# EAGLE board Board (EAGLE 9.7.0)
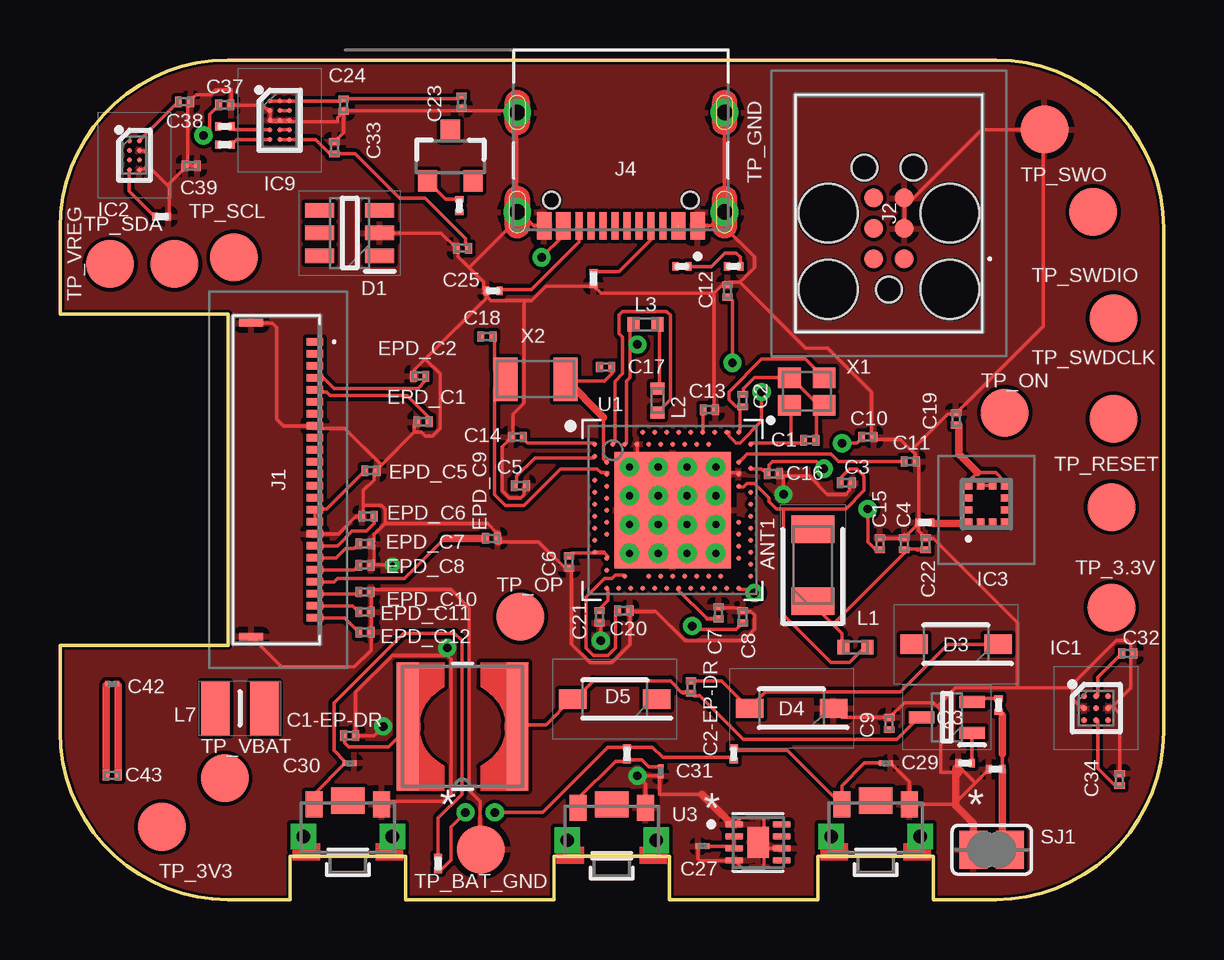
[diagram p0: board, top side]
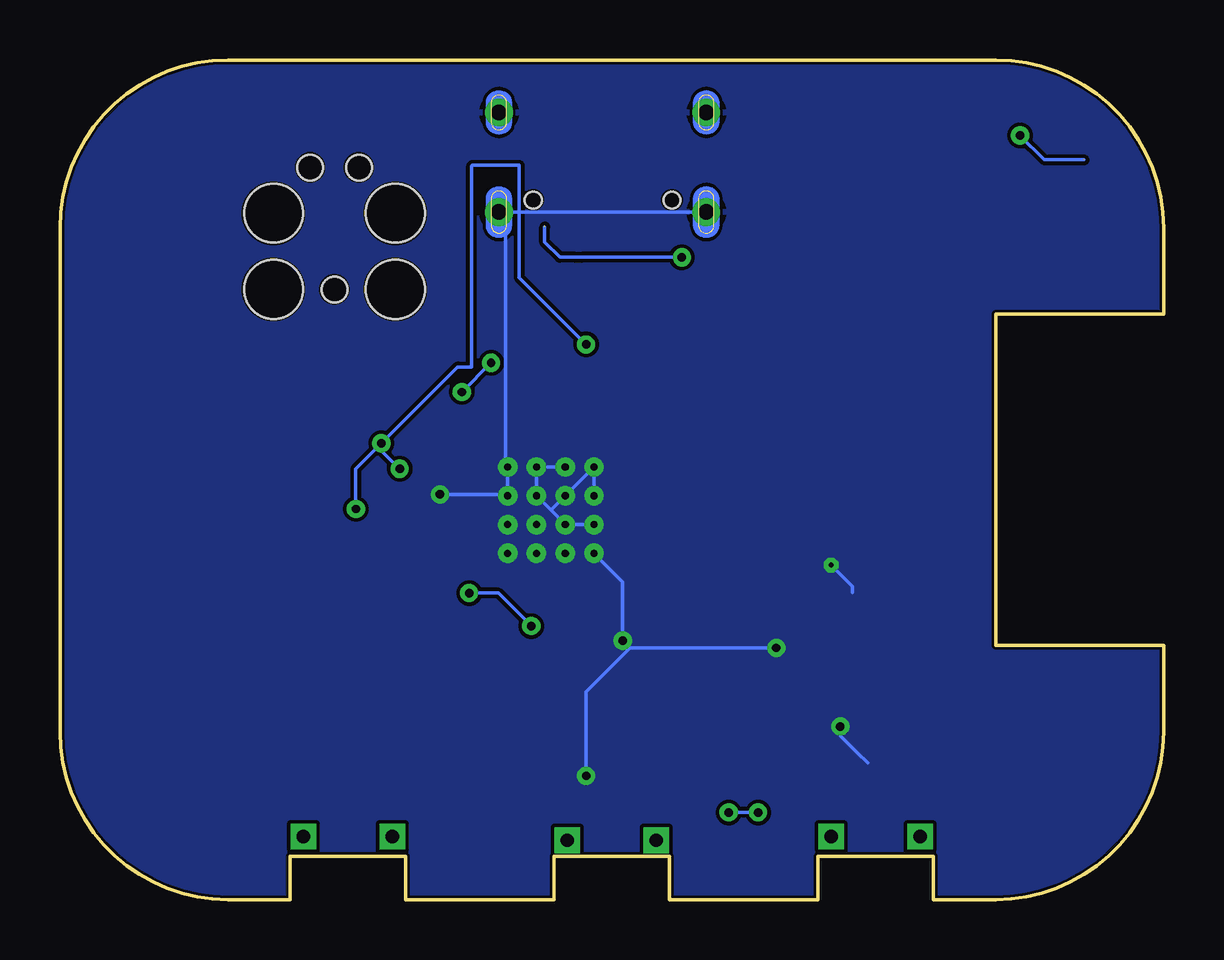
[diagram p1: board, bottom side, seen from below]

Size 46 x 35 mm. Coordinates in mm from the lower left corner, seen from the top.
Outline: 39,0 36.4,0 36.4,1.8 31.6,1.8 31.6,0 25.4,0 25.4,1.8 20.6,1.8 20.6,0 14.4,0 14.4,1.8 9.6,1.8 9.6,0 7,0 arc-90 0,7 0,10.6 7,10.6 7,24.4 0,24.4 0,28 arc-90 7,35 39,35 arc-90 46,28 46,7 arc-90 39,0
Copper layers (1*16): Top 0.035mm / dielectric 1.5mm / Bottom 0.035mm
Design rules "Fusion Electronics Design Rules": minimum track width 6mil, minimum drill 0.2mm, track to track 6mil, track to pad 6mil, pad to pad 6mil, via to via 6mil, smd to smd 0.1324mm, copper to edge 0.1mm, drill to drill 6mil, minimum pad ring 10mil, minimum via ring 8mil, stop-mask expansion 4mil, vias tented up to drill 9999mil, thermal gap 10mil

## Footprints (pad centres in the part's own frame; a part is rotated, then mirrored left to right if it is on the bottom)
2450AT18B100E_ANTC3216X140N = smd 1.15 x 1.8: 1 -1.5,0; 2 1.5,0
NORDIC_NRF_3_RESC0201_L = smd 0.28 x 0.43: 1 -0.255,0; 2 0.255,0
GRM011R60J152KE01L_2_CAPC0201X13N = smd 0.22 x 0.23: 1 -0.185,0; 2 0.185,0
ESP32_C6_LIBRARY_3_SOT95P280X145-6N = smd 1.2 x 0.6: 1 -1.25,0.95; 2 -1.25,0; 3 -1.25,-0.95; 4 1.25,-0.95; 5 1.25,0; 6 1.25,0.95
ESP32_C6_LIBRARY_5_SOD3716X135N = smd 1.15 x 0.8: 1 -1.75,0; 2 1.75,0
ESP32_C6_LIBRARY_4_ESP32_C6_LIBRARY_4_ESP32_C6_LIBRARY_4_ESP32_C6_LIBRARY_4_ESP32_WROVER_SPARKFUN-DISCRETESEMI_SOT23-3 = smd 0.8 x 0.9: 1 -0.95,-1; 2 0.95,-1; 3 0,1.1
DRV2605YZFR_BGA9C50P3X3_144X144X62 = smd 0.25 x 0.25: A1 -0.5,0.5; A2 0,0.5; A3 0.5,0.5; B1 -0.5,0; B2 0,0; B3 0.5,0; C1 -0.5,-0.5; C2 0,-0.5; C3 0.5,-0.5
BQ25180YBGR_BGA8C40P2X4_100X155X50 = smd 0.2 x 0.2: A1 -0.2,0.6; A2 0.2,0.6; B1 -0.2,0.2; B2 0.2,0.2; C1 -0.2,-0.2; C2 0.2,-0.2; D1 -0.2,-0.6; D2 0.2,-0.6
BMA423_BMA423 = smd 0.3 x 0.35: 1 -0.75,-0.775; 2 -0.25,-0.775; 3 0.25,-0.775; 4 0.75,-0.775; 7 0.75,0.775; 8 0.25,0.775; 9 -0.25,0.775; 10 -0.75,0.775 | smd 0.35 x 0.3: 5 0.775,-0.25; 6 0.775,0.25; 11 -0.775,0.25; 12 -0.775,-0.25
RT6160AWSC_BGA15C40P3X5_140X230X60 = smd 0.216 x 0.216: A1 -0.4,0.8; A2 0,0.8; A3 0.4,0.8; B1 -0.4,0.4; B2 0,0.4; B3 0.4,0.4; C1 -0.4,0; C2 0,0; C3 0.4,0; D1 -0.4,-0.4; D2 0,-0.4; D3 0.4,-0.4; E1 -0.4,-0.8; E2 0,-0.8; E3 0.4,-0.8
503480-2400_5034802400 = smd 0.3 x 0.7: 1 -5.75,1.525; 2 -5.25,1.525; 3 -4.75,1.525; 4 -4.25,1.525; 5 -3.75,1.525; 6 -3.25,1.525; 7 -2.75,1.525; 8 -2.25,1.525; 9 -1.75,1.525; 10 -1.25,1.525; 11 -0.75,1.525; 12 -0.25,1.525; 13 0.25,1.525; 14 0.75,1.525; 15 1.25,1.525; 16 1.75,1.525; 17 2.25,1.525; 18 2.75,1.525; 19 3.25,1.525; 20 3.75,1.525; 21 4.25,1.525; 22 4.75,1.525; 23 5.25,1.525; 24 5.75,1.525 | smd 0.3 x 1: MP1 -6.54,-1.125; MP2 6.54,-1.125
TC2030-IDC_TC2030IDC = smd 0.783 x 0.783: 1 -0.953,-0.635; 2 -0.953,0.635; 3 0.317,-0.635; 4 0.317,0.635; 5 1.588,-0.635; 6 1.588,0.635 | hole 2.451: -2.223,-2.54; -2.223,2.54; 0.952,-2.54; 0.952,2.54 | hole 1.067: -2.223,0; 2.857,-1.016; 2.857,1.016
KH-TYPE-C-16P_KINGHELM_KH-TYPE-C-16P = smd 0.6 x 1.15: A1_B12 -3.2,4.725; A4_B9 -2.4,4.725; A9_B4 2.4,4.725; A12_B1 3.2,4.725 | smd 0.3 x 1.15: A5 -1.25,4.725; A6 -0.25,4.725; A7 0.25,4.725; A8 1.25,4.725; B5 1.75,4.725; B6 0.75,4.725; B7 -0.75,4.725; B8 -1.75,4.725 | drill 0.65 pad 1.05: SH1 -4.32,0; SH2 4.32,0; SH3 -4.32,4.15; SH4 4.32,4.15 | hole 0.7: -2.89,3.65; 2.89,3.65
NORDIC_NRF_2_RESC0402_L = smd 0.5 x 0.6: 1 -0.5,0; 2 0.5,0
ESP32_C6_LIBRARY_2_IND_4828-WE-TPC_WRE = smd 0.9 x 5.3: 1 -2.286,0; 2 2.286,0
MLP2016SR47MT0S1_INDC2016X100N = smd 1.2 x 2.2: 1 -1.028,0; 2 1.028,0
ESP32_C6_LIBRARY_6_SOT65P210X110-3N = smd 1.05 x 0.5: 1 -1.05,0.65; 2 -1.05,-0.65; 3 1.05,0
ERA-1AEB3401C_0201 = smd 0.35 x 0.25: 1 0,0.275; 2 0,-0.275
ESP32_C6_LIBRARY_7_JUMPER_SJ = smd 1.168 x 1.6: 1 -0.762,0; 2 0.762,0
2025-10-22_07-23-44_LIBRARY_SW_EVP-AKE31A_PAN = smd 0.711 x 1.092: 1 -1.4,-0.972; 2 1.4,-0.972 | drill 0.559 pad 0.914 square: 3 -1.848,0.381; 4 1.848,0.381 | smd 1.397 x 1.092: 5 0,-1.124
HECTOR_WATCH_1_TP20R = smd 2 x 2: TP 0,0
NORDIC_NRF_4_AQFN50P700X700X85_HS-74N = smd 4.85 x 4.85: P$74 0,0 | drill 0.3 pad 0.6: P$75 -1.8,1.8; P$76 -0.6,1.8; P$77 0.6,1.8; P$78 1.8,1.8; P$79 -1.8,0.6; P$80 -0.6,0.6; P$81 0.6,0.6; P$82 1.8,0.6; P$83 -1.8,-0.6; P$84 -0.6,-0.6; P$85 0.6,-0.6; P$86 1.8,-0.6; P$87 -1.8,-1.8; P$88 -0.6,-1.8; P$89 0.6,-1.8; P$90 1.8,-1.8 | smd 0.2 x 0.2: P$A8 -1.25,3.25; P$A10 -0.75,3.25; P$A12 -0.25,3.25; P$A14 0.25,3.25; P$A16 0.75,3.25; P$A18 1.25,3.25; P$A20 1.75,3.25; P$A22 2.25,3.25; P$A23 2.75,3.25; P$AA24 3.25,-2.25; P$AB2 -2.75,-2.5; P$AC5 -2,-2.75; P$AC9 -1,-2.75; P$AC11 -0.5,-2.75; P$AC13 0,-2.75; P$AC15 0.5,-2.75; P$AC17 1,-2.75; P$AC19 1.5,-2.75; P$AC21 2,-2.75; P$AC24 3.25,-2.75; P$AD2 -2.75,-3.25; P$AD4 -2.25,-3.25; P$AD6 -1.75,-3.25; P$AD8 -1.25,-3.25; P$AD10 -0.75,-3.25; P$AD12 -0.25,-3.25; P$AD14 0.25,-3.25; P$AD16 0.75,-3.25; P$AD18 1.25,-3.25; P$AD20 1.75,-3.25; P$AD22 2.25,-3.25; P$AD23 2.75,-3.25; P$B1 -3.25,2.75; P$B3 -2.5,2.75; P$B5 -2,2.75; P$B7 -1.5,2.75; P$B9 -1,2.75; P$B11 -0.5,2.75; P$B13 0,2.75; P$B15 0.5,2.75; P$B17 1,2.75; P$B19 1.5,2.75; P$B24 3.25,2.75; P$C1 -3.25,2.25; P$D2 -2.75,2; P$D23 2.75,2; P$E24 3.25,1.75; P$F2 -2.75,1.5; P$F23 2.75,1.5; P$G1 -3.25,1.25; P$H2 -2.75,1; P$H23 2.75,1; P$J1 -3.25,0.75; P$J24 3.25,0.75; P$K2 -2.75,0.5; P$L1 -3.25,0.25; P$L24 3.25,0.25; P$M2 -2.75,0; P$N1 -3.25,-0.25; P$N24 3.25,-0.25; P$P2 -2.75,-0.5; P$P23 2.75,-0.5; P$R1 -3.25,-0.75; P$R24 3.25,-0.75; P$T2 -2.75,-1; P$T23 2.75,-1; P$U1 -3.25,-1.25; P$U24 3.25,-1.25; P$V23 2.75,-1.5; P$W1 -3.25,-1.75; P$W24 3.25,-1.75; P$Y2 -2.75,-2; P$Y23 2.75,-2
ESP32_C6_LIBRARY_SON50P200X200X80-9N = smd 0.76 x 0.27: 1 -0.985,0.75; 2 -0.985,0.25; 3 -0.985,-0.25; 4 -0.985,-0.75; 5 0.985,-0.75; 6 0.985,-0.25; 7 0.985,0.25; 8 0.985,0.75 | smd 0.9 x 1.3: 9 0,0
NORDIC_NRF_BT-XTAL_2016_N = smd 0.95 x 0.85: 1 -0.725,-0.575; 2 0.725,-0.575; 3 0.725,0.575; 4 -0.725,0.575
NORDIC_NRF_1_XTAL_3215_N = smd 1 x 1.8: 1 -1.25,0; 2 1.25,0

## Placement (x,y rotation side)
ANT1  2450AT18B100E_2450AT18B100E  [2450AT18B100E_ANTC3216X140N]  31.38,13.94 90 top
C1  12pF  [NORDIC_NRF_3_RESC0201_L]  31.26,19.15 0 top
C1-EP-DR  10µF  [NORDIC_NRF_3_RESC0201_L]  12.08,6.83 0 top
C2  12pF  [NORDIC_NRF_3_RESC0201_L]  28.46,20.8 90 top
C2-EP-DR  4.7µF/25V  [NORDIC_NRF_3_RESC0201_L]  26.3,8.86 270 top
C3  1pF  [NORDIC_NRF_3_RESC0201_L]  32.78,17.37 0 top
C4  1pF  [NORDIC_NRF_3_RESC0201_L]  35.19,14.83 90 top
C5  100nF  [NORDIC_NRF_3_RESC0201_L]  19.19,17.25 0 top
C6  4.7µF  [NORDIC_NRF_3_RESC0201_L]  21.22,14.07 270 top
C7  100nF  [NORDIC_NRF_3_RESC0201_L]  27.45,11.95 90 top
C8  100nF  [NORDIC_NRF_3_RESC0201_L]  28.46,11.79 90 top
C9  820pF  [NORDIC_NRF_3_RESC0201_L]  34.56,7.34 90 top
C10  N.C.  [NORDIC_NRF_3_RESC0201_L]  33.67,19.28 0 top
C11  100pF  [NORDIC_NRF_3_RESC0201_L]  35.45,18.26 0 top
C12  100nF  [NORDIC_NRF_3_RESC0201_L]  27.83,25.37 90 top
C13  N.C.  [NORDIC_NRF_3_RESC0201_L]  27.06,20.42 0 top
C14  4.7µF  [NORDIC_NRF_3_RESC0201_L]  19.06,19.28 180 top
C15  N.C.  [NORDIC_NRF_3_RESC0201_L]  34.18,14.83 90 top
C16  27nF  [NORDIC_NRF_3_RESC0201_L]  29.73,17.75 0 top
C17  12pF  [NORDIC_NRF_3_RESC0201_L]  22.75,22.2 0 top
C18  12pF  [NORDIC_NRF_3_RESC0201_L]  17.79,23.47 0 top
C19  100nF  [NORDIC_NRF_3_RESC0201_L]  37.35,20.04 90 top
C20  4.7µF  [NORDIC_NRF_3_RESC0201_L]  23.51,12.04 0 top
C21  4.7µF  [NORDIC_NRF_3_RESC0201_L]  22.49,11.79 270 top
C22  N.C.  [NORDIC_NRF_3_RESC0201_L]  36.08,14.83 90 top
C23  0.1uF  [NORDIC_NRF_3_RESC0201_L]  16.74,33.25 90 top
C24  10uF  [NORDIC_NRF_3_RESC0201_L]  11.82,33.12 90 top
C25  22uF  [NORDIC_NRF_3_RESC0201_L]  16.78,27.15 180 top
C27  GRM011R60J152KE01L_2_GRM011R60J152KE01L  [GRM011R60J152KE01L_2_CAPC0201X13N]  26.79,2.22 0 top
C29  GRM011R60J152KE01L_2_GRM011R60J152KE01L  [GRM011R60J152KE01L_2_CAPC0201X13N]  34.43,5.69 180 top
C30  GRM011R60J152KE01L_2_GRM011R60J152KE01L  [GRM011R60J152KE01L_2_CAPC0201X13N]  12.08,5.69 180 top
C31  GRM011R60J152KE01L_2_GRM011R60J152KE01L  [GRM011R60J152KE01L_2_CAPC0201X13N]  25.03,5.35 90 top
C32  1µF  [NORDIC_NRF_3_RESC0201_L]  44.51,10.26 0 top
C33  22uF  [NORDIC_NRF_3_RESC0201_L]  11.44,31.34 90 top
C34  0.1µF  [NORDIC_NRF_3_RESC0201_L]  44.16,5 90 top
C37  [NORDIC_NRF_3_RESC0201_L]  6.87,33.12 0 top
C38  [NORDIC_NRF_3_RESC0201_L]  5.2,33.26 0 top
C39  [NORDIC_NRF_3_RESC0201_L]  5.47,30.58 0 top
C42  GRM011R60J152KE01L_2_GRM011R60J152KE01L  [GRM011R60J152KE01L_2_CAPC0201X13N]  2.17,8.99 180 top
C43  4.7uF  [NORDIC_NRF_3_RESC0201_L]  2.17,5.18 0 top
D1  ESP32_C6_LIBRARY_3_USBLC6-2SC6Y  [ESP32_C6_LIBRARY_3_SOT95P280X145-6N]  12.08,27.79 180 top
D3  ESP32_C6_LIBRARY_5_MBR0530  [ESP32_C6_LIBRARY_5_SOD3716X135N]  37.35,10.64 180 top
D4  ESP32_C6_LIBRARY_5_MBR0530  [ESP32_C6_LIBRARY_5_SOD3716X135N]  30.49,7.97 180 top
D5  ESP32_C6_LIBRARY_5_MBR0530  [ESP32_C6_LIBRARY_5_SOD3716X135N]  23.13,8.36 180 top
DMG2305UX-7  20V/4.2A/52mΩ/1.4W  [ESP32_C6_LIBRARY_4_ESP32_C6_LIBRARY_4_ESP32_C6_LIBRARY_4_ESP32_C6_LIBRARY_4_ESP32_WROVER_SPARKFUN-DISCRETESEMI_SOT23-3]  16.27,30.96 0 top
EPD_C1  1uF/50V  [NORDIC_NRF_3_RESC0201_L]  15.13,19.91 0 top
EPD_C2  1uF/50V  [NORDIC_NRF_3_RESC0201_L]  15,21.82 0 top
EPD_C5  0.1uF/50V  [NORDIC_NRF_3_RESC0201_L]  12.97,17.88 180 top
EPD_C6  0.1uF/50V  [NORDIC_NRF_3_RESC0201_L]  12.84,15.98 0 top
EPD_C7  0.1uF/50V  [NORDIC_NRF_3_RESC0201_L]  12.71,14.83 180 top
EPD_C8  0.1uF/50V  [NORDIC_NRF_3_RESC0201_L]  12.71,13.94 180 top
EPD_C9  0.1uF/50V  [NORDIC_NRF_3_RESC0201_L]  17.99,15.06 180 top
EPD_C10  0.1uF/50V  [NORDIC_NRF_3_RESC0201_L]  12.71,12.82 180 top
EPD_C11  0.1uF/50V  [NORDIC_NRF_3_RESC0201_L]  12.71,11.99 180 top
EPD_C12  0.1uF/50V  [NORDIC_NRF_3_RESC0201_L]  12.71,11.15 180 top
IC1  DRV2605YZFR_DRV2605YZFR  [DRV2605YZFR_BGA9C50P3X3_144X144X62]  43.19,7.97 0 top
IC2  BQ25180YBGR_BQ25180YBGR  [BQ25180YBGR_BGA8C40P2X4_100X155X50]  3.1,31.03 0 top
IC3  BMA423_BMA423  [BMA423_BMA423]  38.62,16.48 0 top
IC9  RT6160AWSC_RT6160AWSC  [RT6160AWSC_BGA15C40P3X5_140X230X60]  9.16,32.49 0 top
J1  503480-2400_503480-2400  [503480-2400_5034802400]  9.1,17.5 270 top
J2  TC2030-IDC_TC2030-IDC  [TC2030-IDC_TC2030IDC]  34.56,27.66 90 top
J4  KH-TYPE-C-16P_KH-TYPE-C-16P  [KH-TYPE-C-16P_KINGHELM_KH-TYPE-C-16P]  23.38,32.81 180 top
L1  3.9nH  [NORDIC_NRF_2_RESC0402_L]  33.16,10.52 180 top
L2  10µH  [NORDIC_NRF_2_RESC0402_L]  24.91,20.8 90 top
L3  15nH  [NORDIC_NRF_2_RESC0402_L]  24.4,23.98 180 top
L5  68uH  [ESP32_C6_LIBRARY_2_IND_4828-WE-TPC_WRE]  16.78,7.21 180 top
L7  MLP2016SR47MT0S1_FTC252012SR47MBCA  [MLP2016SR47MT0S1_INDC2016X100N]  7.51,7.97 0 top
Q3  ESP32_C6_LIBRARY_6_SI1308EDL-T1-GE3  [ESP32_C6_LIBRARY_6_SOT65P210X110-3N]  36.97,7.59 180 top
R1_EP_DR  ERA-1AEB3401C_CPF0201D7K68C1  [ERA-1AEB3401C_0201]  39.13,8.1 180 top
R1_USB  ERA-1AEB3401C_CPF0201D7K68C1  [ERA-1AEB3401C_0201]  22.24,25.88 0 top
R2  ERA-1AEB3401C_CPF0201D7K68C1  [ERA-1AEB3401C_0201]  6.87,31.47 90 top
R2_EP_DR  ERA-1AEB3401C_CPF0201D7K68C1  [ERA-1AEB3401C_0201]  37.73,5.69 90 top
R2_USB  ERA-1AEB3401C_CPF0201D7K68C1  [ERA-1AEB3401C_0201]  18.05,25.37 270 top
R3  ERA-1AEB3401C_CPF0201D7K68C1  [ERA-1AEB3401C_0201]  36.05,15.72 90 top
R4  ERA-1AEB3401C_CPF0201D7K68C1  [ERA-1AEB3401C_0201]  6.87,32.23 90 top
R5  ERA-1AEB3401C_CPF0201D7K68C1  [ERA-1AEB3401C_0201]  15.76,1.5 0 top
R7  ERA-1AEB3401C_CPF0201D7K68C1  [ERA-1AEB3401C_0201]  28.08,6.07 0 top
R8  ERA-1AEB3401C_CPF0201D7K68C1  [ERA-1AEB3401C_0201]  23.64,6.07 180 top
R9  ERA-1AEB3401C_CPF0201D7K68C1  [ERA-1AEB3401C_0201]  4.24,28.47 270 top
R17  ERA-1AEB3401C_CPF0201D7K68C1  [ERA-1AEB3401C_0201]  25.92,26.39 270 top
R18  ERA-1AEB3401C_CPF0201D7K68C1  [ERA-1AEB3401C_0201]  28.08,26.39 270 top
R_PWR_EPD  ERA-1AEB3401C_CPF0201D7K68C1  [ERA-1AEB3401C_0201]  16.65,28.93 0 top
R_TYPE_SEL  ERA-1AEB3401C_CPF0201D7K68C1  [ERA-1AEB3401C_0201]  39,5.44 90 top
SJ1  [ESP32_C6_LIBRARY_7_JUMPER_SJ]  38.84,2.07 0 top
SW_DN  2025-10-22_07-23-44_LIBRARY_EVP-AKE31ASW_EVP-AKE31A_PAN  [2025-10-22_07-23-44_LIBRARY_SW_EVP-AKE31A_PAN]  34,3 180 top
SW_ENT  2025-10-22_07-23-44_LIBRARY_EVP-AKE31ASW_EVP-AKE31A_PAN  [2025-10-22_07-23-44_LIBRARY_SW_EVP-AKE31A_PAN]  23,2.85 180 top
SW_UP  2025-10-22_07-23-44_LIBRARY_EVP-AKE31ASW_EVP-AKE31A_PAN  [2025-10-22_07-23-44_LIBRARY_SW_EVP-AKE31A_PAN]  12,3 180 top
TP_3.3V  HECTOR_WATCH_1_TPTP20R  [HECTOR_WATCH_1_TP20R]  43.83,12.17 0 top
TP_3V3  HECTOR_WATCH_1_TPTP20R  [HECTOR_WATCH_1_TP20R]  4.25,3.03 0 top
TP_BAT_GND  HECTOR_WATCH_1_TPTP20R  [HECTOR_WATCH_1_TP20R]  17.54,2.09 0 top
TP_GND  HECTOR_WATCH_1_TPTP20R  [HECTOR_WATCH_1_TP20R]  41.04,32.1 0 top
TP_ON  HECTOR_WATCH_1_TPTP20R  [HECTOR_WATCH_1_TP20R]  39.38,20.29 0 top
TP_OP  HECTOR_WATCH_1_TPTP20R  [HECTOR_WATCH_1_TP20R]  19.19,11.79 0 top
TP_RESET  HECTOR_WATCH_1_TPTP20R  [HECTOR_WATCH_1_TP20R]  43.83,16.36 0 top
TP_SCL  HECTOR_WATCH_1_TPTP20R  [HECTOR_WATCH_1_TP20R]  7.25,26.77 0 top
TP_SDA  HECTOR_WATCH_1_TPTP20R  [HECTOR_WATCH_1_TP20R]  4.77,26.49 0 top
TP_SWDCLK  HECTOR_WATCH_1_TPTP20R  [HECTOR_WATCH_1_TP20R]  43.91,20.04 0 top
TP_SWDIO  HECTOR_WATCH_1_TPTP20R  [HECTOR_WATCH_1_TP20R]  43.91,24.23 0 top
TP_SWO  HECTOR_WATCH_1_TPTP20R  [HECTOR_WATCH_1_TP20R]  43.07,28.68 0 top
TP_VBAT  HECTOR_WATCH_1_TPTP20R  [HECTOR_WATCH_1_TP20R]  6.87,5.05 0 top
TP_VREG  HECTOR_WATCH_1_TPTP20R  [HECTOR_WATCH_1_TP20R]  2.09,26.49 0 top
U1  NORDIC_NRF_4_NRF52840_QF  [NORDIC_NRF_4_AQFN50P700X700X85_HS-74N]  25.54,16.23 0 top
U3  ESP32_C6_LIBRARY_MAX17048G+T10  [ESP32_C6_LIBRARY_SON50P200X200X80-9N]  29.1,2.39 0 top
X1  [NORDIC_NRF_BT-XTAL_2016_N]  31.13,21.18 0 top
X2  32.768kHz  [NORDIC_NRF_1_XTAL_3215_N]  19.82,21.69 180 top

## Library data of the parts
ANT1 = InkTime_v5; ARROW_PART_NUMBER: 2450AT18B100E; ARROW_PRICE-STOCK: https://www.arrow.com/en/products/2450at18b100e/johanson-dielectrics?utm_currency=USD&region=nac; DESCRIPTION: Antennas 2.45GHz ANTENNA; HEIGHT: 1.4mm; MANUFACTURER_NAME: JOHANSON TECHNOLOGY; MANUFACTURER_PART_NUMBER: 2450AT18B100E; MOUSER_PART_NUMBER: 609-2450AT18B100E; MOUSER_PRICE-STOCK: https://www.mouser.co.uk/ProductDetail/Johanson-Technology/2450AT18B100E?qs=yCnrNFeXz%252Bh5MFsFIXGZGA%3D%3D
C1 C1-EP-DR C2 C2-EP-DR C3-C25 C32-C34 C37-C39 C43 EPD_C1 EPD_C2 EPD_C5-EPD_C12 L1-L3 R1_EP_DR R1_USB R2 R2_EP_DR R2_USB R3-R5 R7-R9 R17 R18 R_PWR_EPD R_TYPE_SEL SJ1 TP_3.3V TP_3V3 TP_BAT_GND TP_GND TP_ON TP_OP TP_RESET TP_SCL TP_SDA TP_SWDCLK TP_SWDIO TP_SWO TP_VBAT TP_VREG U1 X1 X2 = InkTime_v5
C27 C29-C31 C42 = InkTime_v5; AVAILABILITY: In Stock; CHECK_PRICES: https://www.snapeda.com/parts/GRM011R60J152KE01L/Murata/view-part/?ref=eda; DESCRIPTION: SMD Capacitor X5R(EIA) with Capacitance: 1500pF Tol. 10%. Rated Voltage: 6.3Vdc; MF: Murata; MP: GRM011R60J152KE01L; PACKAGE: 0201 Murata; PRICE: None; SNAPEDA_LINK: https://www.snapeda.com/parts/GRM011R60J152KE01L/Murata/view-part/?ref=snap
D1 = InkTime_v5; AVAILABILITY: In Stock; CHECK_PRICES: https://www.snapeda.com/parts/USBLC6-2SC6Y/STMicroelectronics/view-part/?ref=eda; DESCRIPTION: 17V Clamp 5A (8/20µs) Ipp Tvs Diode Surface Mount SOT-23-6; MF: STMicroelectronics; MP: USBLC6-2SC6Y; PACKAGE: SOT-23-6 STMicroelectronics; PRICE: None; SNAPEDA_LINK: https://www.snapeda.com/parts/USBLC6-2SC6Y/STMicroelectronics/view-part/?ref=snap
D3-D5 = InkTime_v5; AVAILABILITY: In Stock; CHECK_PRICES: https://www.snapeda.com/parts/MBR0530/Onsemi/view-part/?ref=eda; DESCRIPTION: Diode Schottky 30 V 500mA Surface Mount SOD-123; MF: ON Semiconductor; MP: MBR0530; PACKAGE: SOD-123-2 ON Semiconductor; PRICE: None; PURCHASE-URL: https://www.snapeda.com/api/url_track_click_mouser/?unipart_id=179458&manufacturer=ON Semiconductor&part_name=MBR0530&search_term=None; SNAPEDA_LINK: https://www.snapeda.com/parts/MBR0530/Onsemi/view-part/?ref=snap
DMG2305UX-7 = InkTime_v5; PROD_ID: TRAN-14388
IC1 = InkTime_v5; ARROW_PART_NUMBER: DRV2605YZFR; ARROW_PRICE-STOCK: https://www.arrow.com/en/products/drv2605yzfr/texas-instruments?region=nac; DESCRIPTION: Haptic Driver for ERM/LRA with Built-In Library and Smart Loop Architecture; HEIGHT: 0.625mm; MANUFACTURER_NAME: Texas Instruments; MANUFACTURER_PART_NUMBER: DRV2605YZFR
IC2 = InkTime_v5; ARROW_PART_NUMBER: BQ25180YBGR; ARROW_PRICE-STOCK: https://www.arrow.com/en/products/bq25180ybgr/texas-instruments?utm_currency=USD&region=nac; DESCRIPTION: Charger IC Lithium Ion/Polymer, Lithium Iron Phosphate 8-DSBGA (1.6x1.1); HEIGHT: 0.5mm; MANUFACTURER_NAME: Texas Instruments; MANUFACTURER_PART_NUMBER: BQ25180YBGR; MOUSER_PART_NUMBER: 595-BQ25180YBGR; MOUSER_PRICE-STOCK: https://www.mouser.co.uk/ProductDetail/Texas-Instruments/BQ25180YBGR?qs=doiCPypUmgEWjAK%252BJAX6Tw%3D%3D
IC3 = InkTime_v5; ARROW_PART_NUMBER: BMA423; ARROW_PRICE-STOCK: https://www.arrow.com/en/products/bma423/bosch; DESCRIPTION: Accelerometers Triaxial low-g 12bit Acceleration Sensor; HEIGHT: 1mm; MANUFACTURER_NAME: BOSCH; MANUFACTURER_PART_NUMBER: BMA423; MOUSER_PART_NUMBER: 262-BMA423; MOUSER_PRICE-STOCK: https://www.mouser.co.uk/ProductDetail/Bosch-Sensortec/BMA423?qs=HXFqYaX1Q2xC%252BSgeGoX3mg%3D%3D
IC9 = InkTime_v5; DESCRIPTION: Buck-Boost Regulator Positive Output Step-Up/Step-Down I2C DC-DC Controller IC 15-WL-CSP (BSC) (1.4x2.3); HEIGHT: 0.6mm; MANUFACTURER_NAME: RICHTEK; MANUFACTURER_PART_NUMBER: RT6160AWSC; MOUSER_PART_NUMBER: 835-RT6160AWSC; MOUSER_PRICE-STOCK: https://www.mouser.co.uk/ProductDetail/Richtek/RT6160AWSC?qs=amGC7iS6iy%2FLd9PSoixZXQ%3D%3D
J1 = InkTime_v5; DESCRIPTION: FFC & FPC Connectors 0.5mm FPC RA SMT Dual Contact 24Ckt; HEIGHT: 1.87mm; MANUFACTURER_NAME: Molex; MANUFACTURER_PART_NUMBER: 503480-2400; MOUSER_PART_NUMBER: 538-503480-2400; MOUSER_PRICE-STOCK: https://www.mouser.co.uk/ProductDetail/Molex/503480-2400?qs=OAhjpuo3Vu7efIoxFh9AOw%3D%3D
J2 = InkTime_v5; DESCRIPTION: CABLE ADAPTER 6 POS; HEIGHT: 19mm; MANUFACTURER_NAME: Tag Connect; MANUFACTURER_PART_NUMBER: TC2030-IDC
J4 = InkTime_v5; AVAILABILITY: Not in stock; CHECK_PRICES: https://www.snapeda.com/parts/KH-TYPE-C-16P/Kinghelm/view-part/?ref=eda; MF: kinghelm; MP: KH-TYPE-C-16P; PACKAGE: None; PRICE: None; SNAPEDA_LINK: https://www.snapeda.com/parts/KH-TYPE-C-16P/Kinghelm/view-part/?ref=snap
L5 = InkTime_v5; COPYRIGHT: Copyright (C) 2024 Ultra Librarian. All rights reserved.; MANUFACTURER_PART_NUMBER: 744043680; MFR_NAME: Wurth Electronics
L7 = InkTime_v5; DESCRIPTION: SMD / SMT Inductors (Coils), L=0.47?H, L x W x T :; HEIGHT: 1mm; JLCPCB: https://jlcpcb.com/partdetail/6763488-FTC252012SR47MBCA/C5832368; MANUFACTURER_NAME: TDK; MANUFACTURER_PART_NUMBER: FTC252012SR47MBCA
Q3 = InkTime_v5; AVAILABILITY: In Stock; CHECK_PRICES: https://www.snapeda.com/parts/SI1308EDL-T1-GE3/Vishay+Siliconix/view-part/?ref=eda; DESCRIPTION: Si1308EDL-T1-GE3 N-channel MOSFET Transistor, 1.5 A, 30 V, 3-Pin SC-70 | Siliconix / Vishay SI1308EDL-T1-GE3; MF: Vishay Siliconix; MP: SI1308EDL-T1-GE3; PACKAGE: SOT-323 Vishay Semiconductor; PRICE: None; PURCHASE-URL: https://www.snapeda.com/api/url_track_click_mouser/?unipart_id=274603&manufacturer=Vishay Siliconix&part_name=SI1308EDL-T1-GE3&search_term=None; SNAPEDA_LINK: https://www.snapeda.com/parts/SI1308EDL-T1-GE3/Vishay+Siliconix/view-part/?ref=snap
SW_DN SW_ENT SW_UP = InkTime_v5; COPYRIGHT: Copyright (C) 2025 Ultra Librarian. All rights reserved.; DIGI-KEY_PART_NUMBER_1: P123437TR-ND; DIGI-KEY_PART_NUMBER_2: P123437CT-ND; DIGI-KEY_PART_NUMBER_3: P123437DKR-ND; MANUFACTURER_NAME: Panasonic; MANUFACTURER_PART_NUMBER: EVP-AKE31A
U3 = InkTime_v5; AVAILABILITY: In Stock; CHECK_PRICES: https://www.snapeda.com/parts/MAX17048G+T10/Analog+Devices/view-part/?ref=eda; DESCRIPTION: 3µA 1-Cell/2-Cell Fuel Gauge with ModelGauge; MF: Analog Devices; MP: MAX17048G+T10; PACKAGE: TDFN-8 Maxim; PRICE: None; PURCHASE-URL: https://www.snapeda.com/api/url_track_click_mouser/?unipart_id=329239&manufacturer=Analog Devices&part_name=MAX17048G+T10&search_term=None; SNAPEDA_LINK: https://www.snapeda.com/parts/MAX17048G+T10/Analog+Devices/view-part/?ref=snap

## Nets
GND: C1-EP-DR.2 C3.2 C4.2 C5.2 C6.2 C7.2 C8.2 C9.2 C10.2 C11.2 C12.2 C13.2 C14.2 C15.2 C16.2 C19.2 C20.2 C21.2 C22.2 C23.1 C24.1 C25.2 C27.1 C29.1 C30.1 C31.1 C32.2 C33.2 C34.2 C37.2 C38.2 C39.1 C39.2 D1.2 D4.1 EPD_C1.1 EPD_C2.1 EPD_C5.1 EPD_C6.1 EPD_C7.1 EPD_C8.1 EPD_C9.1 EPD_C10.1 EPD_C11.1 EPD_C12.1 IC1.B1 IC1.B3 IC2.B2 IC2.D2 IC9.B1 IC9.C1 IC9.C2 IC9.C3 J1.8 J1.17 J1.MP1 J1.MP2 J2.3 J2.5 J4.A1_B12 J4.A12_B1 J4.SH1 J4.SH2 J4.SH3 J4.SH4 R1_USB.2 R2_EP_DR.1 R2_USB.2 R3.1 R9.1 R_TYPE_SEL.1 SJ1.1 SW_DN.1 SW_ENT.1 SW_UP.1 TP_BAT_GND.TP TP_GND.TP U1.P$74 U1.P$75 U1.P$76 U1.P$77 U1.P$78 U1.P$79 U1.P$80 U1.P$81 U1.P$82 U1.P$83 U1.P$84 U1.P$85 U1.P$86 U1.P$87 U1.P$88 U1.P$89 U1.P$90 U1.P$B7 U1.P$F23 U3.1 U3.4 U3.6 U3.9
GND1: R1_EP_DR.1 R_TYPE_SEL.2 SJ1.2
GND2: C29.2 R7.1 SW_DN.2
GND3: C31.2 R8.1 SW_ENT.2
GND4: C30.2 R5.1 SW_UP.2
N$1: IC2.D1 R9.2
N$2: IC2.A1
N$3: C38.1 IC2.A2
N$4: IC2.B1
N$5: L7.1
N$6: L7.2
N$7: C37.1 IC2.C2
N$8: C23.2 C24.2 IC9.A1 IC9.A2 IC9.A3
N$9: TP_3V3.TP
N$10: IC9.B2 IC9.B3
N$13: TP_VREG.TP
N$14: IC9.D1 R4.2
N$15: R4.1
N$16: R17.1 R18.1
N$17: R17.2
N$18: R18.2
N$19: TP_SCL.TP
N$20: TP_SDA.TP
N$21: IC9.D2 IC9.D3
N$22: C25.1 C33.1 IC9.E2 IC9.E3
N$23: IC9.E1 R2.2
N$24: R2.1
N$25: C19.1 IC3.7 IC3.10
N$26: IC3.3
N$27: IC3.2
N$28: IC3.6
N$29: IC3.5
N$30: IC3.12
N$31: IC3.8 IC3.9
N$32: IC3.1 R3.2
N$33: TP_3.3V.TP
N$34: TP_RESET.TP
N$35: TP_SWDCLK.TP
N$36: TP_SWDIO.TP
N$37: TP_SWO.TP
N$38: J2.1
N$39: J2.2
N$40: J2.4
N$41: J2.6
N$42: C7.1 U1.P$AD14
N$43: C21.1 U1.P$AD2
N$44: U1.P$AD22
N$45: U1.P$AC21
N$46: U1.P$AD20
N$47: U1.P$AC19
N$48: U1.P$AD18
N$49: U1.P$AC17
N$50: U1.P$AD16
N$51: U1.P$AC15
N$52: U1.P$AC13
N$53: U1.P$AD12
N$54: U1.P$AC11
N$55: U1.P$AD10
N$56: U1.P$AC9
N$57: U1.P$AD8
N$58: U1.P$AD6
N$59: U1.P$AD4
N$60: C8.1 U1.P$AD23
N$61: U1.P$N24
N$62: C9.1
N$63: U1.P$AA24
N$64: U1.P$AC24
N$65: U1.P$Y23
N$66: U1.P$W24
N$67: U1.P$V23
N$68: U1.P$U24
N$69: U1.P$T23
N$70: U1.P$R24
N$71: U1.P$P23
N$72: U1.P$L24
N$73: U1.P$J24
N$74: C3.1 L1.1 U1.P$H23
N$75: ANT1.1 C4.1 C22.1 L1.2
N$76: C10.1 C15.1 C16.1 L3.2 U1.P$B5 U1.P$E24
N$77: C11.1 U1.P$D23
N$78: C1.1 U1.P$B24 X1.1
N$79: C2.1 U1.P$A23 X1.3
N$80: C1.2 C2.2 X1.2 X1.4
N$81: C12.1 U1.P$A22
N$82: U1.P$A20
N$83: U1.P$B19
N$84: U1.P$B17
N$85: U1.P$A16
N$86: U1.P$B15
N$87: U1.P$A14
N$88: U1.P$B13
N$89: U1.P$A12
N$90: U1.P$B11
N$91: U1.P$A10
N$92: U1.P$B9
N$93: U1.P$A8
N$94: C13.1 U1.P$A18
N$95: L2.2 L3.1
N$96: L2.1 U1.P$B3
N$97: C20.1 U1.P$AC5
N$98: C6.1 U1.P$W1 U1.P$Y2
N$99: U1.P$U1
N$100: U1.P$T2
N$101: U1.P$R1
N$102: U1.P$P2
N$103: U1.P$N1
N$104: U1.P$M2
N$105: U1.P$L1
N$106: U1.P$K2
N$107: U1.P$J1
N$108: U1.P$H2
N$109: U1.P$G1
N$110: C14.1 U1.P$B1
N$111: C5.1 U1.P$C1
N$112: C17.2 U1.P$D2 X2.1
N$113: C17.1
N$114: C18.2 U1.P$F2 X2.2
N$115: C18.1
N$116: DMG2305UX-7.3
N$117: DMG2305UX-7.2
N$118: C1-EP-DR.1 L5.2
N$119: C2-EP-DR.2 D5.2 L5.1 Q3.3
N$120: C2-EP-DR.1 D3.1 D4.2
N$121: D3.2
N$122: D5.1
N$123: Q3.1 R2_EP_DR.2
N$124: Q3.2 R1_EP_DR.2
N$125: DMG2305UX-7.1 R_PWR_EPD.1
N$126: R_PWR_EPD.2
N$127: TP_OP.TP
N$128: TP_ON.TP
N$129: IC1.A1
N$130: IC1.A3
N$131: IC1.B2
N$132: C32.1 IC1.A2
N$133: IC1.C3
N$134: C34.1 IC1.C2
N$135: IC1.C1
N$136: R5.2 R7.2 R8.2
N$137: TP_VBAT.TP
N$138: U3.5
N$139: U3.7
N$140: U3.8
N$141: C27.2 U3.2 U3.3
N$142: J1.2
N$143: J1.3
N$144: J1.9
N$145: J1.10
N$146: J1.11
N$147: J1.12
N$148: J1.13
N$149: J1.14
N$150: EPD_C12.2 J1.24
N$151: EPD_C2.2 J1.4
N$152: EPD_C1.2 J1.5
N$153: EPD_C5.2 J1.15 J1.16
N$154: EPD_C11.2 J1.23
N$155: EPD_C10.2 J1.22
N$156: EPD_C9.2 J1.21
N$157: EPD_C8.2 J1.20
N$158: EPD_C7.2 J1.19
N$159: EPD_C6.2 J1.18
N$160: J4.B6
N$161: J4.B7
N$162: J4.A4_B9 J4.A9_B4
N$163: J4.A6
N$164: J4.A7
N$165: J4.B5 R2_USB.1
N$166: J4.A5 R1_USB.1
N$167: D1.3
N$168: D1.1
N$169: D1.6
N$170: D1.5
N$171: D1.4
N$172: C42.2 C43.1
N$173: C42.1 C43.2
SDA/2.4C: IC2.C1

## Tracks (layer width: path | path; a pad name or v marks a point on that pad's centre or on a via)
GND  (via drill 0.2 pad 0.5, 0.35)
  Top 0.152: 42.2,8.81 42.2,8.97 44.03,10.79 44.49,10.79 44.64,10.64 44.64,10.34 44.72,10.26 C32.2 44.69,10.18 44.64,10.18 44.64,8.81 43.88,8.05 | 42.2,8.81 42.2,8.36 42.51,8.05 42.66,8.05 42.66,8.01 IC1.B1 | 43.88,8.05 43.73,8.05 43.69,8.02 IC1.B3 | 43.88,8.05 44.18,7.75 44.18,5.31 44.16,5.29 C34.2 | 32.3,7.9 32.37,7.82 | 32.37,7.82 32.6,7.59 C9.2 34.58,7.6 34.58,7.59 35.19,8.2 36.41,8.2 36.56,8.05 | 37.48,5.31 36.72,5.31 36.72,7.9 36.56,8.05 | 39.92,8.81 37.33,8.81 36.56,8.05 | 39.92,8.81 42.2,8.81 | 34.43,15.06 35.19,15.06 C4.2 | 34.43,15.06 34.28,15.06 | 35.5,18.72 35.65,18.57 35.65,18.26 C11.2 35.8,18.26 35.8,15.82 35.77,15.8 R3.1 | 35.5,18.72 35.04,19.18 33.97,19.18 33.97,19.23 C10.2 33.87,19.28 33.82,19.33 33.82,21.16 31.99,22.99 31.08,22.99 28.33,25.73 | 35.5,18.72 37.02,20.24 37.33,20.24 37.35,20.27 C19.2 37.38,20.3 40.98,23.9 40.98,31.47 | 35.19,15.21 C4.2 | 40.98,31.47 40.98,31.98 | 39.92,8.81 39.92,11.56 36.41,15.06 36.11,15.06 C22.2 35.77,15.39 R3.1 | U3.9 29.1,2.21 | 29.1,2.51 U3.9 | 29.1,2.36 U3.9 | 26.76,4.39 24.98,4.39 24.98,5.11 C31.1 v24.07,5.16 24.4,4.82 SW_ENT.1 24.52,3.94 | 16.14,10.18 13.86,10.18 12.33,8.66 C1-EP-DR.2 13.09,6.83 v13.47,7.21 | 16.14,10.18 16.29,10.03 16.29,4.39 15.99,4.09 13.52,4.09 SW_UP.1 | v22.54,10.79 22.54,11.48 C21.2 | 30.16,17.65 31.23,17.65 31.99,16.89 32.75,16.89 32.91,17.04 32.91,17.35 33.01,17.35 C3.2 | 30.16,17.65 30.01,17.65 30.01,17.73 C16.2 | 24.07,18.95 24.07,18.41 23.76,18.11 23.76,18.01 U1.P$74 | 24.07,18.95 24.07,19.02 | 24.98,14.45 24.98,15.52 25.54,16.08 U1.P$74 | 26.2,14.45 26.2,15.57 U1.P$74 | 26.2,16.89 U1.P$81 | 27.42,15.52 27.42,14.45 25.64,16.23 U1.P$74
  Top 0.152: v30.16,16.89 30.16,17.65 | v16.14,10.49 16.14,10.18 | 23.76,12.01 24.83,12.01 26.05,10.79 28.49,10.79 28.94,11.25 28.94,11.86 28.79,12.01 28.49,12.01 28.49,12.02 C8.2 28.33,12.17 27.49,12.17 C7.2 | 18.28,14.91 19.95,14.91 21.17,13.69 21.22,13.74 C6.2 21.32,13.71 21.32,10.64 22.09,9.88 23,9.88 23.76,10.64 23.76,12.01 | 17.51,2.12 17.51,4.09 17.06,4.55 17.06,12.17 16.29,12.93 13.07,12.93 EPD_C10.1 EPD_C11.1 EPD_C12.1 12.97,10.39 12.27,9.69 9.24,9.69 J1.MP2 | 17.51,2.12 17.51,2.11 | 27.27,25.27 27.27,20.47 C13.2 | 27.27,25.27 27.72,25.73 C12.2 27.83,25.68 27.88,25.73 28.33,25.73 | 28.33,25.73 28.94,26.34 28.94,26.8 27.7,28.04 J4.SH3 | 8.83,32.44 9.11,32.44 | 9.11,32.44 11.57,32.44 11.57,32.59 11.82,32.84 C24.1 | 3.64,30.61 3.49,30.45 3.33,30.45 IC2.D2 | 3.64,30.61 3.64,31.06 3.49,31.22 3.34,31.22 3.33,31.23 IC2.B2 | 4.56,29.69 4.56,29.84 5.22,30.5 C39.1 5.24,30.61 5.32,30.61 | 4.56,29.69 4.56,28.47 R9.1 | 5.32,30.61 5.47,30.61 5.5,30.58 C39.2 | 4.56,29.69 3.64,30.61 | 12.64,16.43 12.64,17.04 13.09,17.5 13.09,17.8 13.15,17.8 EPD_C5.1 13.22,17.93 13.4,18.11 | 12.64,16.43 12.64,15.98 EPD_C6.1 12.33,15.98 11.61,15.25 J1.17 | 14.77,19.48 14.77,19.79 14.87,19.89 EPD_C1.1 | 13.4,18.11 14.77,19.48 | 13.4,18.11 11.88,19.63 10.66,19.63 10.66,19.72 J1.8 9.32,19.75 9.03,20.04 9.03,23.85 8.84,24.04 J1.MP1 | 13.09,14.96 13.09,15.21 13.55,15.67 | 13.09,14.96 13.09,14.91 | 13.55,15.67 13.55,16.28 13.4,16.43 12.64,16.43 | 19.04,28.78 19.04,32.74 19.06,32.76 J4.SH2 19.04,32.83 19.04,32.89 16.75,32.89 16.75,32.98 C23.1 16.64,32.89 11.85,32.89 C24.1 | 17.06,26.34 16.6,26.8 16.6,27.1 16.55,27.15 C25.2 15.89,27.79 D1.2
  Top 0.152: 17.06,26.34 17.67,25.73 17.67,25.43 17.72,25.37 R2_USB.2 17.67,25.27 17.82,25.12 | 22.24,25.58 20.26,25.58 19.65,24.97 19.34,24.97 | 19.34,24.97 17.97,24.97 17.82,25.12 | 17.82,25.12 15.23,22.53 | 15.23,22.53 14.77,22.07 14.77,21.92 14.74,21.89 EPD_C2.1 | 19.34,24.97 19.34,20.7 18.88,20.24 18.88,19.33 18.86,19.33 C14.2 18.81,19.25 18.43,18.87 18.43,17.04 18.73,16.74 19.19,16.74 19.34,16.89 19.34,17.2 19.39,17.2 C5.2 | 19.04,28.62 19.04,28.32 17.06,26.34 | 14.77,19.48 15.07,19.48 15.23,19.33 15.53,19.33 15.84,19.63 15.84,21.92 15.23,22.53 | 27.27,25.27 22.54,25.27 22.24,25.58 | 22.24,25.58 R1_USB.2 | 13.55,15.67 17.82,15.67 18.25,15.24 | C27.1 26.6,1.71 26.68,1.62 28.1,1.62 U3.4 28.5,1.24 29.35,1.24 29.35,2.13 U3.9 | U3.6 29.35,2.14 U3.9 | U3.9 29.35,2.64 29.35,3.4 28.38,3.4 U3.1 | 38.17,4.87 37.26,3.97 SW_DN.1 35.4,4.9 C29.1 | 38.17,4.87 R_TYPE_SEL.1 | IC9.C2 IC9.C1 IC9.B1 8.68,32.89 8.45,33.12 C37.2 7.12,33.76 6.49,33.76 6.29,33.55 5.68,33.55 5.45,33.33 C38.2 5.32,33.13 5.32,30.61 | C24.1 11.82,31.98 C33.2 | J4.A1_B12 27.13,28.09 J4.SH3 | J4.SH1 J4.SH3 | U1.P$B7 24.07,18.95 | C20.2 23.76,12.02 23.76,12.01 | D4.1 32.37,7.85 32.37,7.82 | R3.1 35.77,15.67 C4.2 | C15.2 34.4,15.09 34.43,15.06 | U1.P$F23 28.29,17.76 28.33,17.8 27.57,17.8 27.42,17.96 27.27,17.96 U1.P$74 | TP_BAT_GND.TP 17.51,2.12 | 40.98,31.47 41.04,31.52 TP_GND.TP 38.43,32.1 35.57,29.25 J2.5 J2.3 | U1.P$74 U1.P$87 | U1.P$74 26.74,16.23 U1.P$86 | U1.P$74 U1.P$85 U1.P$89 | U1.P$74 25.54,15.03 U1.P$88 | 38.17,4.87 37.46,5.58 R2_EP_DR.1 | IC9.C2 9.11,32.44 | IC9.C3 IC9.C2 | 19.04,28.78 19.73,28.09 J4.A12_B1 | J4.SH4 19.04,28.68 19.04,28.78
  Top 0.152: 13.09,14.96 EPD_C7.1 13.02,14.83 13.09,14.76 13.09,14 13.02,14 EPD_C8.1 v13.86,13.94 | U1.P$74 U1.P$78 | U1.P$74 24.27,16.23 23.74,16.76 U1.P$79 | U1.P$74 U1.P$90
  Top 0.305: 18.25,15.24 EPD_C9.1 18.28,15.03 18.28,14.91 | U3.1 28.02,3.14 26.76,4.39 | SJ1.1 38.08,3.19 37.35,3.91 37.35,5.18 | 37.48,5.31 37.35,5.18 | 37.35,5.18 37.35,5.48 37.46,5.58
  Bottom 0.152: U1.P$87 22.54,13.23 v22.54,10.79 22.24,10.49 | v30.16,16.89 27.4,16.89 U1.P$82 U1.P$78 27.42,18.11 27.42,28.17 27.72,28.47 27.72,28.64 J4.SH3 | 22.24,10.49 v16.14,10.49 | v24.07,5.16 24.07,8.66 22.24,10.49 | U1.P$74 U1.P$81 U1.P$77 U1.P$76 | U1.P$74 U1.P$84 U1.P$83 | U1.P$74 U1.P$80 U1.P$75 U1.P$79 | 19.19,28.53 J4.SH4 J4.SH3 | 27.57,28.53 J4.SH3 | v13.86,13.94 12.97,13.05 12.97,12.8 | 13.47,6.96 v13.47,7.21 13.47,6.83 12.78,6.13 12.33,5.69
  pour Top: 31.59,1.82 31.62,1.83 36.48,1.83 36.51,1.82 36.53,1.8 36.54,1.77 36.54,0.05 39.25,0.05 40.06,0.1 40.85,0.24 41.62,0.48 42.35,0.81 43.04,1.23 43.67,1.72 44.24,2.29 44.73,2.92 45.15,3.61 45.48,4.35 45.72,5.11 45.86,5.9 45.91,6.71 45.91,28.42 45.86,29.21 45.72,29.98 45.49,30.74 45.16,31.46 44.76,32.13 44.27,32.75 43.71,33.31 43.09,33.79 42.42,34.2 41.7,34.53 40.95,34.76 40.17,34.9 39.38,34.95 6.24,34.95 5.5,34.9 4.77,34.77 4.06,34.55 3.38,34.25 2.74,33.86 2.16,33.4 1.64,32.88 1.18,32.29 0.79,31.66 0.49,30.98 0.27,30.27 0.13,29.54 0.09,28.8 0.09,24.56 6.86,24.56 6.87,24.56 6.88,24.56 6.89,24.56 6.89,24.56 6.92,24.55 6.93,24.55 6.93,24.55 6.94,24.55 6.95,24.55 6.98,24.53 6.99,24.53 6.99,24.52 6.99,24.52 7,24.51 7.03,24.49 7.03,24.48 7.04,24.48 7.04,24.48 7.04,24.46 7.06,24.43 7.06,24.42 7.07,24.42 7.07,24.42 7.07,24.41 7.07,24.38 7.07,24.37 7.07,24.36 7.08,24.35 7.07,24.35 7.07,10.63 7.06,10.6 7.04,10.58 7.01,10.57 0.15,10.57 0.12,10.56 0.11,10.56 0.1,10.54 0.09,10.53 0.09,10.51 0.09,6.58 0.14,5.79 0.28,5.02 0.51,4.26 0.84,3.54 1.24,2.87 1.73,2.25 2.29,1.69 2.91,1.21 3.58,0.8 4.3,0.47 5.05,0.24 5.83,0.1 6.62,0.05 9.46,0.05 9.46,1.62 9.46,1.62 9.46,1.63 9.46,1.64 9.46,1.65 9.47,1.67 9.47,1.69 9.47,1.69 9.47,1.69 9.48,1.7 9.49,1.73 9.5,1.74 9.5,1.74 9.5,1.75 9.51,1.76 9.53,1.78 9.54,1.79 9.55,1.79 9.55,1.79 9.56,1.8 9.59,1.81 9.6,1.82 9.6,1.82 9.6,1.82 9.62,1.82 9.64,1.83 9.65,1.83 9.66,1.83 9.67,1.83 9.67,1.83 14.38,1.83 14.41,1.82 14.43,1.8 14.44,1.77 14.44,0.05 20.51,0.05 20.51,1.77 20.52,1.8 20.54,1.82 20.57,1.83 25.43,1.83 25.46,1.82 25.48,1.8 25.49,1.77 25.49,0.05 31.56,0.05 31.56,1.77 31.57,1.8
  pour Bottom: 20.54,1.82 20.57,1.83 25.43,1.83 25.46,1.82 25.48,1.8 25.49,1.77 25.49,0.05 31.56,0.05 31.56,1.77 31.57,1.8 31.59,1.82 31.62,1.83 36.48,1.83 36.51,1.82 36.53,1.8 36.54,1.77 36.54,0.05 39.63,0.05 40.39,0.1 41.14,0.23 41.86,0.46 42.55,0.77 43.2,1.16 43.8,1.63 44.33,2.16 44.8,2.76 45.19,3.41 45.5,4.1 45.73,4.82 45.86,5.57 45.91,6.33 45.91,29.05 45.87,29.75 45.74,30.44 45.54,31.1 45.25,31.74 44.89,32.33 44.46,32.88 43.97,33.37 43.42,33.8 42.82,34.16 42.19,34.45 41.52,34.66 40.84,34.78 40.14,34.82 7.64,34.82 7.64,34.82 7.63,34.82 7.62,34.82 7.61,34.83 7.58,34.83 7.57,34.83 7.57,34.83 7.57,34.83 7.56,34.84 7.53,34.85 7.52,34.86 7.51,34.86 7.51,34.86 7.5,34.87 7.48,34.9 7.47,34.9 7.47,34.91 7.47,34.91 7.46,34.92 7.45,34.95 7.45,34.95 6.11,34.95 5.38,34.91 4.67,34.77 3.97,34.56 3.31,34.26 2.69,33.88 2.12,33.44 1.6,32.92 1.15,32.35 0.78,31.73 0.48,31.06 0.26,30.37 0.13,29.66 0.09,28.93 0.09,24.56 6.86,24.56 6.87,24.56 6.88,24.56 6.89,24.56 6.89,24.56 6.92,24.55 6.93,24.55 6.93,24.55 6.94,24.55 6.95,24.55 6.98,24.53 6.99,24.53 6.99,24.52 6.99,24.52 7,24.51 7.03,24.49 7.03,24.48 7.04,24.48 7.04,24.48 7.04,24.46 7.06,24.43 7.06,24.42 7.07,24.42 7.07,24.42 7.07,24.41 7.07,24.38 7.07,24.37 7.07,24.36 7.08,24.35 7.07,24.35 7.07,10.63 7.06,10.6 7.04,10.58 7.01,10.57 0.15,10.57 0.12,10.56 0.11,10.56 0.1,10.54 0.09,10.53 0.09,10.51 0.09,6.58 0.14,5.79 0.28,5.02 0.51,4.26 0.84,3.54 1.24,2.87 1.73,2.25 2.29,1.69 2.91,1.21 3.58,0.8 4.3,0.47 5.05,0.24 5.83,0.1 6.62,0.05 9.46,0.05 9.46,1.77 9.47,1.8 9.49,1.82 9.52,1.83 14.38,1.83 14.41,1.82 14.43,1.8 14.44,1.77 14.44,0.05 20.51,0.05 20.51,1.77 20.52,1.8
  pour Bottom: 20.54,1.82 20.57,1.83 25.43,1.83 25.46,1.82 25.48,1.8 25.49,1.77 25.49,0.05 31.56,0.05 31.56,1.77 31.57,1.8 31.59,1.82 31.62,1.83 36.35,1.83 36.38,1.82 36.4,1.8 36.41,1.77 36.41,0.11 36.41,0.09 36.42,0.07 36.43,0.06 36.45,0.05 36.47,0.05 39.89,0.05 40.62,0.09 41.33,0.23 42.03,0.44 42.69,0.74 43.31,1.12 43.88,1.56 44.4,2.08 44.85,2.65 45.22,3.27 45.52,3.94 45.74,4.63 45.87,5.34 45.91,6.07 45.91,26 45.91,26.01 45.91,26.02 45.91,26.02 45.91,26.03 45.92,26.06 45.92,26.07 45.92,26.07 45.92,26.08 45.93,26.09 45.94,26.12 45.95,26.13 45.95,26.13 45.95,26.13 45.96,26.14 45.98,26.16 45.99,26.17 45.99,26.17 46,26.18 46.01,26.18 46.04,26.2 46.04,26.2 46.04,28.55 45.99,29.31 45.86,30.05 45.63,30.77 45.32,31.46 44.93,32.11 44.46,32.71 43.92,33.24 43.33,33.71 42.68,34.1 41.99,34.41 41.27,34.64 40.52,34.78 39.76,34.82 6.11,34.82 5.38,34.78 4.67,34.65 3.97,34.43 3.31,34.13 2.69,33.76 2.12,33.31 1.6,32.79 1.15,32.22 0.78,31.6 0.48,30.94 0.26,30.24 0.13,29.53 0.09,28.8 0.09,24.56 6.86,24.56 6.87,24.56 6.88,24.56 6.89,24.56 6.89,24.56 6.92,24.55 6.93,24.55 6.93,24.55 6.94,24.55 6.95,24.55 6.98,24.53 6.99,24.53 6.99,24.52 6.99,24.52 7,24.51 7.03,24.49 7.03,24.48 7.04,24.48 7.04,24.48 7.04,24.46 7.06,24.43 7.06,24.42 7.07,24.42 7.07,24.42 7.07,24.41 7.07,24.38 7.07,24.37 7.07,24.36 7.08,24.35 7.07,24.35 7.07,10.63 7.06,10.6 7.04,10.58 7.01,10.57 0.09,10.57 0.09,6.45 0.14,5.68 0.28,4.92 0.51,4.18 0.82,3.48 1.22,2.81 1.7,2.21 2.25,1.66 2.85,1.18 3.52,0.78 4.22,0.47 4.96,0.24 5.72,0.1 6.49,0.05 9.46,0.05 9.46,1.62 9.46,1.62 9.46,1.63 9.46,1.64 9.46,1.65 9.47,1.67 9.47,1.69 9.47,1.69 9.47,1.69 9.48,1.7 9.49,1.73 9.5,1.74 9.5,1.74 9.5,1.75 9.51,1.76 9.53,1.78 9.54,1.79 9.55,1.79 9.55,1.79 9.56,1.8 9.59,1.81 9.6,1.82 9.6,1.82 9.6,1.82 9.62,1.82 9.64,1.83 9.65,1.83 9.66,1.83 9.67,1.83 9.67,1.83 14.38,1.83 14.41,1.82 14.43,1.8 14.44,1.77 14.44,0.18 20.45,0.18 20.46,0.18 20.47,0.18 20.48,0.18 20.48,0.17 20.51,0.17 20.51,0.17 20.51,1.77 20.52,1.8
GND1
  Top 0.152: 39.31,2.26 39.41,2.16 39.46,2.11 39.49,2.07 SJ1.2 | R1_EP_DR.1 39.28,7.68 | 39.28,6.07 R_TYPE_SEL.2
  Top 0.305: 39.28,7.68 39.28,6.07 | R_TYPE_SEL.2 39.28,2.29 39.41,2.16
GND2
  Top 0.152: 32.6,4.04 SW_DN.2 | SW_DN.2 32.6,4.75 33.54,5.69 C29.2 | R7.1 28.18,6.24 28.18,6.22 30.32,6.22 32.57,3.97 SW_DN.2
GND3
  Top 0.152: 21.63,4.24 21.63,3.94 21.6,3.91 SW_ENT.2 21.6,4.21 23.15,5.77 23.61,5.77 R8.1 23.66,5.82 24.27,5.82 24.55,5.53 C31.2
GND4
  Top 0.152: SW_UP.2 10.6,4.4 C30.2 11.88,5.71 11.88,5.77 11.42,6.22 11.42,8.2 14.31,11.1 16.45,11.1 16.75,10.79 16.75,4.39 15.76,3.4 R5.1
N$1
  Top 0.152: 2.88,30.45 2.88,29.54 3.95,28.47 R9.2 | IC2.D1 2.88,30.45 | 2.88,30.45
N$3
  Top 0.152: C38.1 4.92,33.26 IC2.A2
N$7  (via drill 0.35)  (1 unrouted)
  Top 0.152: C37.1 6.24,32.74 6.24,32.11 v5.98,31.85
  Bottom 0.152: v5.98,31.85 4.97,30.84 3.95,30.84 3.32,30.84
N$8
  Top 0.152: IC9.A1 IC9.A2 IC9.A3 11.73,33.29 C24.2 16.61,33.38 C23.2
N$10
  Top 0.152: IC9.B2 IC9.B3
N$14
  Top 0.152: R4.2 7.29,32.09 IC9.D1
N$16
  Top 0.152: R17.1 27.17,26.39 27.72,26.95 28.18,26.95 28.36,26.77 R18.1
N$21
  Top 0.152: IC9.D3 IC9.D2
N$22
  Top 0.152: 10.3,31.67 10.66,31.67 11.24,31.09 C33.1 12.31,31.09 14.16,29.23 15.23,29.23 16.9,27.56 16.9,27.25 16.93,27.25 C25.1 | 10.3,31.67 9.59,31.67 | IC9.E2 IC9.E3 10.29,31.69 10.3,31.67
N$23
  Top 0.152: R2.2 7.36,31.69 IC9.E1
N$25
  Top 0.152: IC3.7 39.37,17.44 39,17.8 38.24,17.8 37.87,17.44 IC3.10 | C19.1 37.48,19.79
  Top 0.305: 37.48,19.79 37.48,18.57 38.24,17.8
N$31
  Top 0.152: IC3.9 IC3.8
N$32
  Top 0.152: IC3.1 37.83,15.67 | 36.41,15.67 36.37,15.67 R3.2
  Top 0.305: 37.83,15.67 36.97,15.67 36.41,15.67
N$42
  Top 0.152: 26.96,11.71 25.74,12.93 U1.P$AD14 | 27.42,11.71 26.96,11.71 | C7.1 26.98,11.7 26.96,11.71
N$43
  Top 0.152: U1.P$AD2 22.85,12.93 22.85,12.47 22.49,12.12 C21.1
N$60  (via drill 0.35)
  Top 0.152: v28.94,12.78 28.79,12.93 28.33,12.93 28.33,12.94 U1.P$AD23 | v26.35,11.4 26.5,11.25 28.18,11.25 28.33,11.4 28.34,11.4 C8.1
  Bottom 0.152: v28.94,12.78 27.72,12.78 v26.35,11.4
N$74
  Top 0.152: 30.16,16.28 32.75,16.28 33.52,17.04 33.52,17.65 33.21,17.96 32.91,17.96 32.45,17.5 32.45,17.45 C3.1 | 30.16,16.28 29.86,16.28 29.55,16.59 29.55,16.74 28.94,17.35 28.64,17.35 28.49,17.2 28.33,17.2 U1.P$H23 | 30.16,16.28 30.16,11.86 32.14,9.88 32.91,9.88 33.52,10.49 33.63,10.49 L1.1
N$75
  Top 0.152: 35.95,14.6 35.7,14.6 | 35.7,14.6 35.19,14.6 C4.1 35.19,14.45 32.3,11.56 32.14,11.56 | 32.14,11.56 31.38,12.32 ANT1.1 | 32.14,11.56 32.6,11.1 32.6,10.57 L1.2 | C22.1 35.73,14.58 35.7,14.6
N$76  (via drill 0.35)
  Top 0.152: 23.76,23.9 23.76,23.85 | 23.76,23.85 23.76,23.14 | 23.76,23.14 23.76,21.77 23.61,21.62 23.61,19.02 23.58,19.02 U1.P$B5 | 33.97,14.6 34.12,14.6 | 33.97,14.6 33.67,14.91 v33.67,16.28 | v32.6,19.02 33.21,19.02 33.41,19.23 C10.1 | v31.84,17.96 31.53,18.26 29.71,18.26 29.55,18.11 29.55,17.8 29.53,17.8 C16.1 29.45,17.75 29.25,17.96 28.79,17.96 U1.P$E24 | v24.07,23.14 23.76,23.14 | L3.2 23.77,23.85 23.76,23.85 | C15.1 34,14.58 33.97,14.6
  Bottom 0.152: v33.67,16.28 33.67,17.96 32.75,18.87 | 32.75,18.87 v31.84,17.96 | 32.75,18.87 v32.6,19.02 29.43,22.2 28.84,22.2 28.84,30.58 28.82,30.61 26.86,30.61 26.86,25.93 v24.07,23.14
N$77
  Top 0.152: 28.46,18.39 28.64,18.57 32.14,18.57 32.45,18.26 C11.1 | 28.46,18.39 28.33,18.26 | U1.P$D23 28.45,18.39 28.46,18.39
N$78
  Top 0.152: 30.47,19.02 30.93,19.02 31,19.1 C1.1 | 30.47,19.02 28.79,19.02 U1.P$B24 | 30.47,19.02 30.47,20.54 | 30.47,20.54 30.47,20.55 | X1.1 30.47,20.54
N$79
  Top 0.152: 28.33,20.42 28.33,20.55 28.18,20.55 27.88,20.85 27.88,21.16 29.25,22.53 31.08,22.53 X1.3 | 28.33,20.42 28.33,19.48 U1.P$A23 | 28.33,20.42 C2.1
N$80
  Top 0.152: 31.84,20.7 31.53,20.7 31.41,20.83 | 31.41,20.83 30.47,21.77 30.41,21.77 X1.4 30.32,21.76 30.32,21.77 28.94,21.77 28.49,21.31 28.49,21.16 28.46,21.13 C2.2 | 31.41,20.83 31.63,20.83 X1.2 31.85,20.56 31.53,20.24 31.53,19.18 C1.2
N$81  (via drill 0.35)
  Top 0.152: v29.25,21.16 29.25,19.94 28.33,19.02 28.18,19.02 27.88,19.33 27.88,19.48 U1.P$A22 | v28.03,22.38 28.03,24.97 27.88,25.12 C12.1
  Bottom 0.152: v28.03,22.38 v29.25,21.16
N$94
  Top 0.152: C13.1 26.81,19.48 U1.P$A18
N$95
  Top 0.152: 24.98,23.89 24.98,21.31 L2.2 | 24.98,23.89 24.98,23.9 | L3.1 24.98,23.89
N$96
  Top 0.152: U1.P$B3 23.13,19.07 23.13,21.59 23.46,21.92 23.46,23.44 23.3,23.6 23.3,24.36 23.46,24.51 25.29,24.51 25.44,24.36 25.44,20.85 24.91,20.32 L2.1
N$97
  Top 0.152: U1.P$AC5 23.52,13.48 23.46,13.54 23.15,13.54 23,13.38 22.7,13.38 21.93,12.62 21.93,10.49 22.24,10.18 22.85,10.18 23.15,10.49 23.15,12.01 23.23,12.01 C20.1
N$98
  Top 0.152: 22.7,14.45 22.85,14.3 22.79,14.24 U1.P$Y2 | 22.7,14.45 21.32,14.45 21.32,14.43 C6.1 | 22.7,14.45 22.67,14.48 U1.P$W1
N$110
  Top 0.152: U1.P$B1 22.24,19.02 19.5,19.02 19.34,19.18 19.34,19.25 C14.1
N$111
  Top 0.152: U1.P$C1 22.29,18.47 22.24,18.41 19.8,18.41 19.04,17.65 19.04,17.35 C5.1
N$112
  Top 0.152: X2.1 21.09,21.69 21.17,21.62 22.7,21.62 23,21.92 23,22.07 C17.2 | 22.66,20.1 22.66,18.36 U1.P$D2
  Top 0.305: 22.66,20.1 X2.1
N$114
  Top 0.152: U1.P$F2 22.79,17.75 22.85,17.8 22.54,17.8 22.39,17.96 20.87,17.96 19.34,16.43 18.58,16.43 18.12,16.89 18.12,21.31 18.43,21.62 18.5,21.62 X2.2 18.5,21.69 18.12,22.07 18.12,23.44 18.1,23.47 C18.2
N$118
  Top 0.152: C1-EP-DR.1 11.88,6.83 11.88,6.53 12.03,6.38 13.7,6.38 14.49,7.16 L5.2
N$119
  Top 0.152: 25.9,8.66 26.2,8.66 | 25.9,8.66 25.44,9.12 22.24,9.12 21.48,8.36 D5.2 21.32,8.36 20.26,7.29 19.14,7.29 L5.1 | 26.66,8.51 26.68,8.48 | 26.68,8.48 28.49,6.68 34.89,6.68 35.8,7.59 Q3.3 | 26.68,8.48 26.43,8.48 C2-EP-DR.2 25.95,8.61 25.9,8.66
N$120
  Top 0.152: D3.1 37.02,10.64 35.04,8.66 29.4,8.66 28.74,8 D4.2 28.71,7.97 27.57,9.12 26.35,9.12 C2-EP-DR.1
N$123
  Top 0.152: Q3.1 38.02,6.07 38.02,5.7 R2_EP_DR.2
N$124
  Top 0.152: R1_EP_DR.2 38.15,8.38 Q3.2
N$125
  Top 0.152: R_PWR_EPD.1 16.08,29.2 DMG2305UX-7.1
N$132
  Top 0.152: IC1.A2 43.23,8.51 43.27,8.51 43.27,9.27 C32.1
N$134
  Top 0.152: IC1.C2 43.24,7.47 43.27,7.44 43.27,5.46 44.03,4.7 44.11,4.7 C34.1
N$136  (via drill 0.35)
  Top 0.152: v16.9,3.63 16.29,3.02 16.29,1.65 15.87,1.22 R5.2 | v18.12,3.63 20.1,3.63 22.82,6.35 R8.2 24.71,6.35 25.13,5.92 28.03,5.92 28.03,5.85 R7.2
  Bottom 0.152: v16.9,3.63 v18.12,3.63
N$141
  Top 0.152: U3.2 U3.3 28.02,2.22 C27.2
N$150
  Top 0.152: J1.24 11.86,11.75 EPD_C12.2
N$151
  Top 0.152: EPD_C2.2 15.25,21.79 15.23,21.77 15.23,21.62 14.92,21.31 11.42,21.31 10.96,21.77 10.64,21.77 J1.4
N$152
  Top 0.152: EPD_C1.2 15.38,20.09 14.47,21 11.27,21 11.11,21.16 10.66,21.16 10.66,21.22 J1.5
N$153
  Top 0.152: J1.15 J1.16 | EPD_C5.2 11.11,16.28 10.66,16.28 J1.15 | J1.15
N$154
  Top 0.152: J1.23 12.19,12.25 EPD_C11.2
N$155
  Top 0.152: J1.22 12.38,12.75 EPD_C10.2
N$156
  Top 0.152: 16.04,15.06 14.36,13.38 11.57,13.38 11.44,13.25 J1.21
  Top 0.305: 16.04,15.06 EPD_C9.2
N$157
  Top 0.152: J1.20 12.26,13.75 EPD_C8.2
N$158
  Top 0.152: J1.19 11.52,14.25 11.9,14.63 12.26,14.63 EPD_C7.2
N$159
  Top 0.152: EPD_C6.2 13.09,15.67 12.79,15.37 12.18,15.37 11.56,14.75 J1.18
N$162  (via drill 0.35)  (1 unrouted)
  Top 0.152: J4.A9_B4 20.98,27.67 v20.08,26.77
  Bottom 0.152: v20.08,26.77 24.27,26.77 24.52,26.77 25.16,26.77 25.79,27.41 25.79,28.04
N$165
  Top 0.152: R2_USB.1 18.37,25.43 19.65,25.43 21.63,27.41 J4.B5
N$166
  Top 0.152: R1_USB.1 22.24,26.19 23.3,26.19 24.63,27.51 J4.A5
N$172
  Top 0.152: C42.2 1.92,8.92
  Top 0.305: 1.92,8.92 C43.1
N$173
  Top 0.152: C42.1 2.43,8.92
  Top 0.305: 2.43,8.92 C43.2